# Altium PCB Roseta_Shield.PcbDoc
Units mm, origin at the board's own origin, x right, y up, seen from the top; angles counter-clockwise.
Board outline 152.4 x 101.6 mm, 2 copper layers (Top Layer, Bottom Layer); 72 components, 75 nets, 235 pads, 0 vias.
Unrouted connection lines stored in the file: 45.
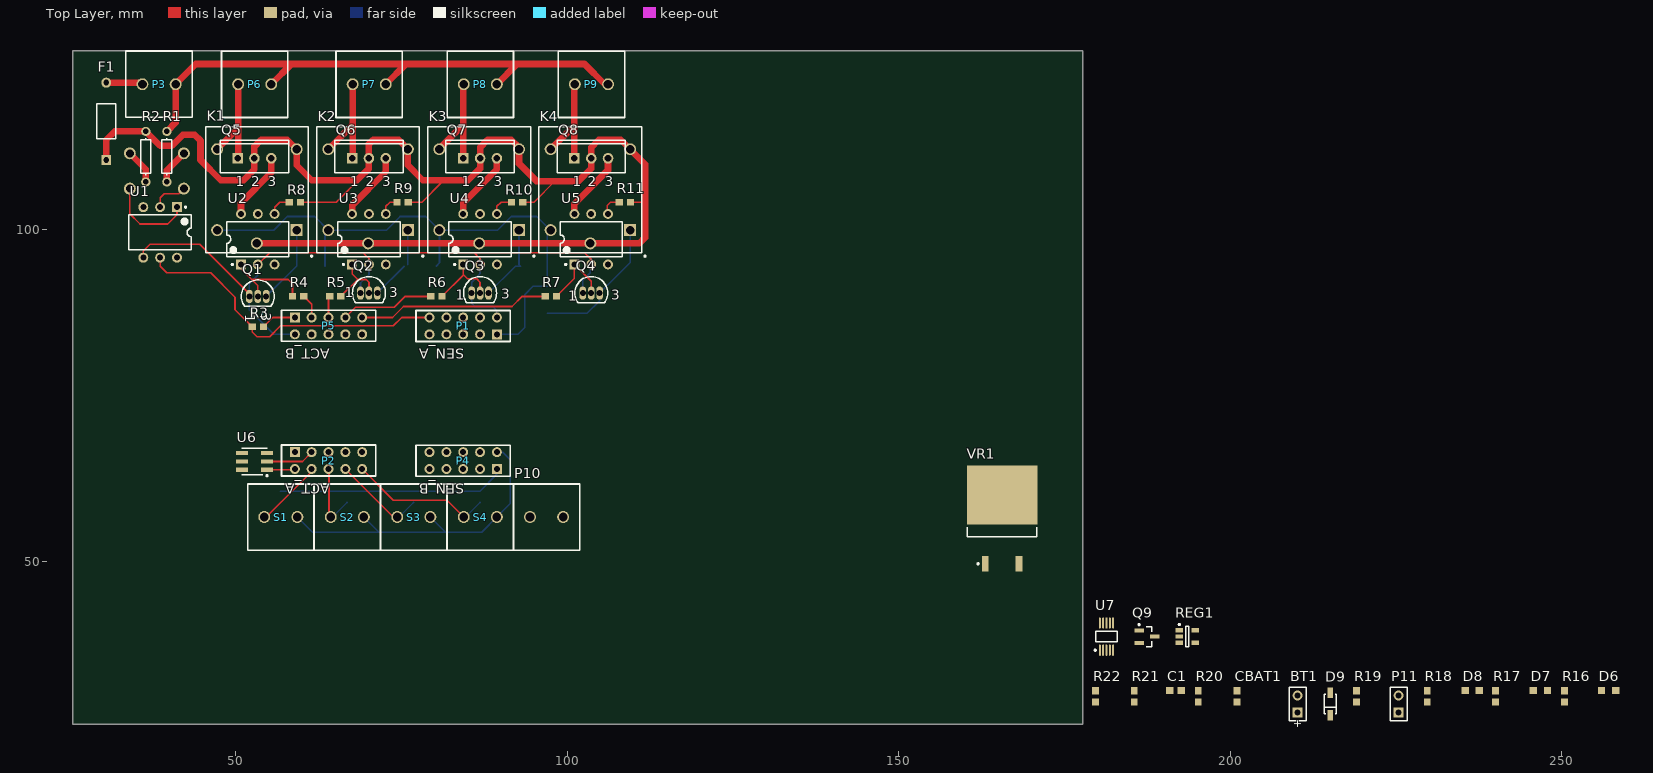
[diagram p0: Top Layer view]
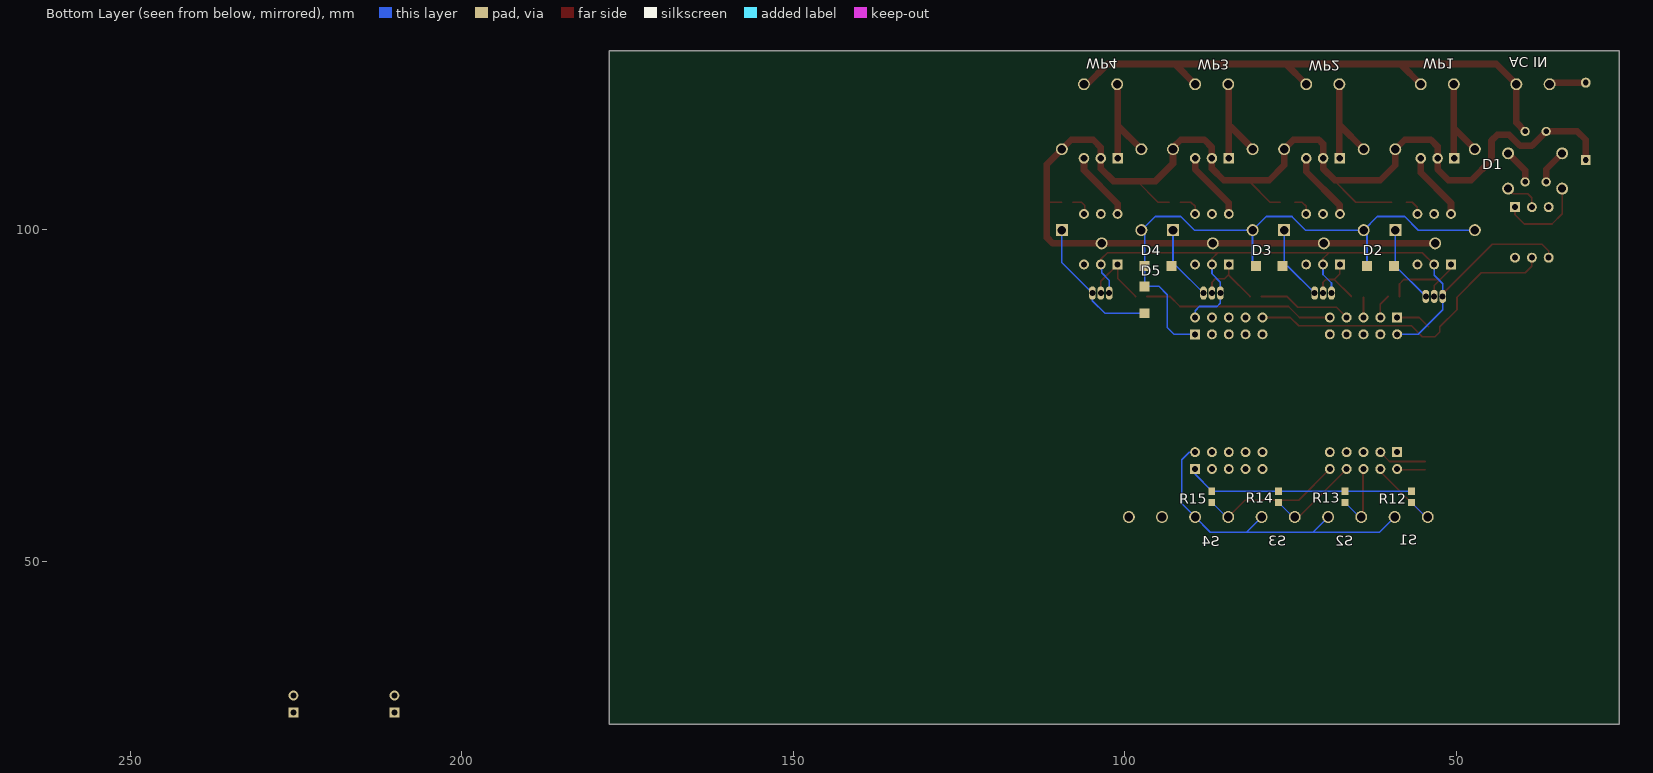
[diagram p1: Bottom Layer view, seen from below]

## Layer stack, top to bottom
Top Layer: signal copper 0.0356
Dielectric: dielectric 0.32, FR-4, Dk 4.8
Bottom Layer: signal copper 0.0356

## Board outline
25.4,25.4 177.8,25.4 177.8,127 25.4,127

## Design rules (kind name [scope] priority, off if disabled: settings)
Clearance [All] p1: gap=0.254
PolygonConnect [All] p1: connectstyle=Relief reliefconductorwidth=0.254 reliefentries=4 polygonreliefangle="90 Angle"
RoutingVias [All] p1: holewidth=0.711 width=1.27 viastyle="Through Hole" minholewidth=0.711 minwidth=1.27 maxholewidth=0.711 maxwidth=1.27
SilkscreenOverComponentPads [All] p1: minsilkscreentomaskgap=0.254
SolderMaskExpansion [All] p1: expansion=0.102
Width [All] p1: maxlimit=0.254 minlimit=0.254 preferedwidth=0.254
27 further rules are at their usual default settings.

## Classes and differential pairs
component class Battery: BT1 C1 CBAT1 D6 D7 D8 D9 P11 Q9 R16 R17 R18 R19 R20 R21 R22 REG1 U7
component class AC: D1 D2 D3 D4 D5 F1 K1 K2 K3 K4 P3 P6 P7 P8 P9 Q1 Q2 Q3 Q4 Q5 Q6 Q7 Q8 R1 R2 R3 R4 R5 R6 R7 R8 R9 R10 R11 U1 U2 U3 U4 U5
component class Roseta_Shield: P1 P2 P4 P5 P10 U6 VR1 VR?
component class Switches: R12 R13 R14 R15 S1 S2 S3 S4

## Components (designator, comment, footprint, x,y, rotation, side; value= is the part's Value field where it differs from the comment)
BT1 "Li-Ion" BAT-2 210.185,28.448 r90 top
C1 "Cap" 1608[0603] 191.77,30.48 r0 top
CBAT1 "Cap" 1608[0603] 201.041,29.591 r90 top
D1 "DF04M" DF04M 34.036,106.172 r90 bottom
D2 "Diode 1N4004" 1n4007 59.436,94.488 r0 bottom
D3 "Diode 1N4004" 1n4007 76.2,94.488 r0 bottom
D4 "Diode 1N4004" 1n4007 92.964,94.488 r0 bottom
D5 "Diode 1N4004" 1n4007 97.028,87.376 r90 bottom
D6 "Charge in Progress" 2013[0805] 256.032,30.48 r0 top
D7 "Charge Complete" 2013[0805] 245.745,30.48 r0 top
D8 "Power OK" 2013[0805] 235.458,30.48 r0 top
D9 "D Schottky" SOD123/X.85 215.138,28.448 r90 top
F1 "Fuse 2" PIN-W2/E2.8 30.48,116.332 r90 top
K1 "Relay-SPDT" RELAY-HRS4 60.96,96.52 r90 top
K2 "Relay-SPDT" RELAY-HRS4 77.724,96.52 r90 top
K3 "Relay-SPDT" RELAY-HRS4 94.488,96.52 r90 top
K4 "Relay-SPDT" RELAY-HRS4 111.252,96.52 r90 top
P1 "SEN_A" HDR2X5_Female_Slim 89.408,84.201 r180 top
P2 "ACT_A" HDR2X5_Female_Slim 58.928,66.421 r0 top
P3 "AC IN" "TERMINAL BLOCK X2" 35.941,121.92 r0 top
P4 "SEN_B" HDR2X5_Female_Slim 89.408,63.881 r180 top
P5 "ACT_B" HDR2X5_Female_Slim 58.928,86.741 r0 top
P6 "WP1" "TERMINAL BLOCK X2" 55.372,121.92 r180 top
P7 "WP2" "TERMINAL BLOCK X2" 72.644,121.92 r180 top
P8 "WP3" "TERMINAL BLOCK X2" 89.408,121.92 r180 top
P9 "WP4" "TERMINAL BLOCK X2" 106.172,121.92 r180 top
P10 "DC IN" "TERMINAL BLOCK X2" 99.4,56.642 r180 top
P11 "5V_IN" HDR1X2 225.425,27.178 r90 top
Q1 "2N3904" BCY-W3/E4 53.34,89.916 r270 top
Q2 "2N3904" BCY-W3/E4 70.104,90.424 r270 top
Q3 "2N3904" BCY-W3/E4 86.868,90.424 r270 top
Q4 "2N3904" BCY-W3/E4 103.632,90.424 r270 top
Q5 "BT138" 221A-09 52.832,110.744 r0 top
Q6 "BT138" 221A-09 70.104,110.744 r0 top
Q7 "BT138" 221A-09 86.868,110.744 r0 top
Q8 "BT138" 221A-09 103.632,110.744 r0 top
Q9 "BSH202" SOT95P240-3M 187.452,38.608 r0 top
R1 "1/2" AXIAL-0.3 39.624,110.998 r90 top
R2 "1/2" AXIAL-0.3 36.449,110.998 r90 top
R3 "Res2" 1608[0603] 53.34,85.344 r180 top
R4 "Res2" 1608[0603] 59.436,89.916 r180 top
R5 "Res2" 1608[0603] 65.024,89.916 r0 top
R6 "Res2" 1608[0603] 80.264,89.916 r0 top
R7 "Res2" 1608[0603] 97.536,89.916 r0 top
R8 "Res2" 1608[0603] 58.928,104.14 r0 top
R9 "Res2" 1608[0603] 75.184,104.14 r0 top
R10 "Res2" 1608[0603] 92.456,104.14 r0 top
R11 "Res2" 1608[0603] 108.712,104.14 r0 top
R12 "Res2" 1608[0603] 56.769,59.69 r270 bottom
R13 "Res2" 1608[0603] 66.802,59.69 r270 bottom
R14 "Res2" 1608[0603] 76.835,59.69 r270 bottom
R15 "Res2" 1608[0603] 86.868,59.69 r270 bottom
R16 "Res2" 1608[0603] 250.444,29.591 r90 top
R17 "Res2" 1608[0603] 240.03,29.591 r90 top
R18 "Res2" 1608[0603] 229.743,29.591 r90 top
R19 "Res2" 1608[0603] 219.075,29.591 r90 top
R20 "Res2" 1608[0603] 195.199,29.591 r90 top
R21 "Res2" 1608[0603] 185.547,29.591 r90 top
R22 "Res2" 1608[0603] 179.705,29.591 r90 top
REG1 "LD6806TD/33H" SOT-23-OT5_N 193.548,38.608 r0 top
S1 "SW-WALL" "TERMINAL BLOCK X2" 59.309,56.642 r180 top
S2 "SW-WALL" "TERMINAL BLOCK X2" 69.342,56.642 r180 top
S3 "SW-WALL" "TERMINAL BLOCK X2" 79.375,56.642 r180 top
S4 "SW-WALL" "TERMINAL BLOCK X2" 89.408,56.642 r180 top
U1 "Optoisolator1" DIP-6 38.608,99.568 r270 top
U2 "MOC3021" DIP-6 53.34,98.552 r90 top
U3 "MOC3021" DIP-6 70.104,98.552 r90 top
U4 "MOC3021" DIP-6 86.868,98.552 r90 top
U5 "MOC3021" DIP-6 103.632,98.552 r90 top
U6 "DS2431P" TSOC6 52.832,65.024 r90 top
U7 "MCP73833-AMI/UN" MSOP-UN10_N 181.356,38.608 r90 top
VR1 "LM7805" TO254P1510-3_4N 165.608,56.388 r90 top

## Footprints (in the part's own frame and the unit in brackets; to place one, negate y for a bottom-side part, rotate by r counter-clockwise, add the part's x,y. Pads: shape width x height; smd on the part's side, far side on the other; paste and mask are expansions set on the pad)
1n4007 [mm] "Chip Capacitor; Body 1.6 x 0.8 mm (LxW typ)"
  rect 1.5x1.5 smd: 1(0,0) 2(4.05,0)
  body extent -0.3,-0.75 4.4,0.75, height 2
221A-09 [mm] "TO, Thru-Hole, Vertical, Heatsink Mounted; 3 In-Line Leads; Pitch 2.54 mm"
  rect 1.6x1.6 hole 1: 1(-2.54,0)
  round 1.6 hole 1: 2(0,0) 3(2.54,0)
  silkscreen extent -5.15,-2.2 5.15,2.7
1608[0603] [mm] "Chip Capacitor; Body 1.6 x 0.8 mm (LxW typ)"
  rect 1.1x1 smd: 1(-0.85,0) 2(0.85,0)
  body extent -1,-0.5 0.9,0.5, height 1.3
2013[0805] [mm] "Chip Capacitor; Body 2.0 x 1.3 mm (LxW typ)"
  rect 1.1x1 smd: 1(0,0) 2(2.15,0)
  body extent 0,-0.5 2.15,0.5, height 1.3
AXIAL-0.3 [mm] "Axial Device, Thru-Hole; 2 Leads; 0.3 in Pin Spacing"
  round 1.4 hole 0.85: 1(-3.81,0) 2(3.81,0)
  silkscreen extent -2.77,-0.76 2.77,0.76
BAT-2 [mm] "Multicell Battery; 2 Leads"
  rect 1.5x1.5 hole 0.9: 1(-1.27,0)
  round 1.5 hole 0.9: 2(1.27,0)
  silkscreen extent -2.54,-1.27 2.54,1.27
BCY-W3/E4 [mm] "TO, Flat Index; 3 In-Line, Axial Leads; Body Dia. 4.5mm; Leads 0.51 x 0.48 mm (max)"
  oval 2x1 hole 0.9: 1(0,-1.27) 2(0,0) 3(0,1.27)
  silkscreen extent -2.48,-2.48 1.5,2.48
DF04M [mm] "Chip Capacitor; Body 2.0 x 1.3 mm (LxW typ)"
  round 1.8 hole 1.2: 1(0,0) 2(5.33,0) 3(0,8.15) 4(5.33,8.15)
DIP-6 [mm] "DIP; 6 Leads; Row Spacing 7.62 mm; Pitch 2.54 mm"
  rect 1.5x1.5 hole 0.9: 1(-3.81,2.54)
  round 1.5 hole 0.9: 2(-3.81,0) 3(-3.81,-2.54) 4(3.81,-2.54) 5(3.81,0) 6(3.81,2.54)
  silkscreen extent -3.93,-4.7 2.65,4.7, body extent -3.55,-4.7 3.55,4.7, height 5.46
HDR1X2 [mm] "Connector; Header; 2 Position"
  rect 1.5x1.5 hole 0.9: 1(0,0)
  round 1.5 hole 0.9: 2(2.54,0)
  silkscreen extent -1.27,-1.27 3.81,1.27
HDR2X5_Female_Slim [mm] "Connector; Header; 5x2 Housing"
  rect 1.5x1.5 hole 0.9: 1(0,0)
  round 1.5 hole 0.9: 2(0,-2.54) 3(2.54,0) 4(2.54,-2.54) 5(5.08,0) 6(5.08,-2.54) 7(7.62,0) 8(7.62,-2.54) 9(10.16,0) 10(10.16,-2.54)
  silkscreen extent -2,-3.6 12.2,1.07
MSOP-UN10_N [mm] "TSSOP, 10-Leads, Body 3x3mm, Pitch 0.5mm, IPC Medium Density"
  oval 1.7x0.3 smd: 1(-2.05,1) 2(-2.05,0.5) 3(-2.05,0) 4(-2.05,-0.5) 5(-2.05,-1) 6(2.05,-1) 7(2.05,-0.5) 8(2.05,0) 9(2.05,0.5) 10(2.05,1)
  silkscreen extent -2.17,-1.6 0.8,1.82, body extent -1.6,-1.6 1.6,1.6, height 1.1
PIN-W2/E2.8 [mm] "Fuse; 2 Leads"
  rect 1.5x1.5 hole 0.9: 1(-5.825,0)
  round 1.5 hole 0.9: 2(5.825,0)
  silkscreen extent -2.65,-1.4 2.65,1.4
RELAY-HRS4 [mm] "DIP; 5 Round Pins; Row Space 15.24 mm; Pitch 2.54 mm"
  round 1.8 hole 1.3: 1(1.4,7.75) 2(15.6,1.75) 3(15.6,13.75) 5(3.4,13.75)
  rect 1.8x1.8 hole 1.3: 4(3.4,1.75)
  silkscreen extent -0.65,-0.63 19,15.5
SOD123/X.85 [mm] "SOD-123; 2 Leads; Body 2.7 x 1.6 mm, (LxW)"
  rect 1.6x0.85 smd: 1(-1.7,0) 2(1.7,0)
  silkscreen extent -1.45,-0.9 1.45,0.9
SOT95P240-3M [mm] "SOT23, 3-Leads, Body 2.9x1.3mm, Pitch 0.95mm, Lead Span 2.4mm, IPC Low Density"
  rect 1.45x0.6 smd: 1(-1.175,0.95) 2(-1.175,-0.95) 3(1.175,0)
  silkscreen extent -1.3,-1.5 0.7,1.92, body extent -0.7,-1.5 0.7,1.5, height 1.14
SOT-23-OT5_N [mm] "SOT23, 5-Leads, Body 2.9x1.6mm, Pitch 0.95mm, Lead Span 2.7mm, IPC Medium Density"
  rect 1.1x0.65 smd: 1(-1.2,0.95) 2(-1.2,0) 3(-1.2,-0.95) 4(1.2,-0.95) 5(1.2,0.95)
  silkscreen extent -1.32,-1.55 0.25,1.95, body extent -0.9,-1.55 0.9,1.55, height 1.45
"TERMINAL BLOCK X2" [mm]
  round 1.8 hole 1.3: 1(0,0) 2(5,0)
  silkscreen extent -2.5,-4.98 7.5,5.02
TO254P1510-3_4N [mm] "D2-PAK, 4-Leads, Body 8.8x10.4mm, Pitch 2.54mm, Lead Span 15.1mm, IPC Medium Density"
  rect 2.4x1.05 smd: 1(-6.8,2.54) 3(-6.8,-2.54)
  rect 8.9x10.65 smd: 2(3.55,0)
  silkscreen extent -6.92,-5.25 -1.3,5.25, body extent -2.7,-5.28 6.3,5.28, height 4.69
TSOC6 [mm] "Small Outline; 6 C-Bend Leads; Body Width 3.8 mm; Pitch 1.27 mm"
  rect 0.65x1.8 smd: 1(-1.27,-1.9) 2(0,-1.9) 3(1.27,-1.9) 4(1.27,1.9) 5(0,1.9) 6(-1.27,1.9)
  silkscreen extent -2.27,-2.02 2,1.95

## Part data
BT1: library part Battery, "Multicell Battery"
C1 CBAT1: "Capacitor"
D1: library part Bridge2, "Diode Bridge"
D2 D3 D4 D5: "1 Amp General Purpose Rectifier"
D6 D7 D8: library part "LED SMD (0603)"
D9: "Schottky Diode"
F1: "Fuse"
K1 K2 K3 K4: "Single-Pole Dual-Throw Relay"
P1 P2 P4 P5: library part "Header 5X2", "Header, 5-Pin, Dual row"
P3 P6 P7 P8 P9 P10 P11: library part "Header 2", "Header, 2-Pin"
Q1 Q2 Q3 Q4: "NPN General Purpose Amplifier"
Q5 Q6 Q7 Q8: library part MAC15A6, "Silicon Bidirectional Triode Thyristor"
Q9: "P-channel Enhancement Mode MOSFET"
R1 R2: library part Res1, "Resistor"
R3 R4 R5 R6 R7 R8 R9 R10 R11 R12 R13 R14 R15 R16 R17 R18 R19 R20 R21 R22: "Resistor"
REG1: library part TC1014-1.8VCT713, "50 mA, 100 mA and 150 mA CMOS LDOs with Active-Low Shutdown and Reference Bypass, 5-Pin SOT-23, Extended Temperature, Tape and Reel"
S1 S2 S3 S4: library part SW-PB, "Switch"
U1: "4-Pin Phototransistor Optocoupler"
U2 U3 U4 U5: library part "Opto TRIAC", "Opto-Triac"
U6: library part DS2430AP, "256-Bit 1-Wire EEPROM"
U7: "Stand-Alone Linear Li-Ion/Li-Polymer Charge Management Controller with Power-Good Output, 4.2V, 10-Pin MSOP, Industrial Temperature"
VR1: library part "Volt Reg", "Voltage Regulator"

## Nets (pads, with @x,y where several pads share a name; then routed paths per layer and width w, separated by ;. In a path a pad name is that pad's centre, name@x,y a point inside that pad or via, vN(x,y) a via of type N, cw(c..) or ccw(c..) an arc to the next point about the centre after c; other vN are vias at no path point)
3.3V: P2.1 P4.1 P5.1 R12.1 R13.1 R14.1 R15.1 R22.2 REG1.5 | length 42.9
  Top Layer w0.254: 54.19,85.344 55.587,86.741 P5.1
  Bottom Layer w0.254: 59.905,60.54 R12.1 R13.1 R14.1 R15.1 89.408,63.08 P4.1
5V: D2.2 D3.2 D4.2 D5.2 D6.1 D7.1 D8.1 D9.1 K1.5 K2.5 K3.5 K4.5 P1.1 P11.2 Q9.1 R19.1 U7.1 U7.2 VR1.3 | length 87.7
  Bottom Layer w0.254: K1.5 55.724,99.92 57.785,101.981 61.913,101.981 K2.5 ; D2.2 63.486,99.432 K2.5 ; D3.2 80.738,94.976 K3.5 ; P1.1 92.583,84.201 93.599,85.217 93.599,90.17 94.855,91.426 D5.2 ; D5.2@97.014,91.948 D4.2 K4.5@97.014,99.432 ; K4.5 95.441,101.981 91.567,101.981 89.506,99.92 K3.5 ; K2.5 72.742,99.92 74.803,101.981 78.677,101.981 K3.5
12V: P10.2 VR1.1
AC_IN1: Q1.2 R4.2 U2.1 | length 13.5
  Top Layer w0.254: U2.1@50.8,94.107 52.451,92.456 ; Q1.2 53.34,91.567 52.451,92.456 ; R4.2 58.586,91.782 57.912,92.456 52.451,92.456
AC_IN2: Q2.2 R5.2 U3.1 | length 9.7
  Top Layer w0.254: R5.2 68.414,92.456 ; U3.1 67.564,93.306 68.414,92.456 ; Q2.2 70.104,92.075 69.723,92.456 68.414,92.456
AC_IN3: Q3.2 R6.2 U4.1 | length 10.8
  Top Layer w0.254: R6.2 84.328,93.13 84.328,93.218 ; U4.1 84.328,93.218 ; Q3.2 86.868,92.075 86.36,92.583 84.963,92.583 84.328,93.218
AC_IN4: Q4.2 R7.2 U5.1 | length 11.3
  Top Layer w0.254: R7.2 101.092,92.622 U5.1 103.632,92.202 Q4.2
AC_OUT1: K1.3 P6.2 Q5.1 | length 15.7
  Top Layer w1: K1.3 50.372,115.282 ; K1.3@47.216,112.113 K1.3@47.223,112.12 ; Q5.1@50.372,110.744 P6.2
AC_OUT2: K2.3 P7.2 Q6.1 | length 16.3
  Top Layer w1: K2.3 67.644,115.79 ; Q6.1@67.644,110.824 67.644,115.79 ; P7.2 67.644,115.79
AC_OUT3: K3.3 P8.2 Q7.1 | length 15.8
  Top Layer w1: K3.3@80.808,112.05 80.808,112.304 83.9,115.396 ; Q7.1@84.328,110.617 P8.2@84.328,121.793
AC_OUT4: K4.3 P9.2 Q8.1 | length 21.6
  Top Layer w1: K4.3@97.508,112.113 101.092,115.697 101.092,121.492 Q8.1
ADC0: P4.9
ADC1: P4.10
ADC2: P4.7
ADC3: P4.8
ADC4: P1.4
ADC5: P1.3
ADC6: P1.6
ADC7: P1.5
FASE: F1.1 K1.1 K1.2 K2.1 K2.2 K3.1 K3.2 K4.1 K4.2 Q5.2 Q6.2 Q7.2 Q8.2 R2.2 R8.2 R9.2 R10.2 R11.2 | length 217.7
  Top Layer w0.254: R8.2 65.151,104.14 69.025,108.013 ; R9.2@76.542,104.14 78.105,104.14 81.153,107.188 81.153,107.442 ; K3.2 K3.2@92.738,112.367 ; R10.2 94.996,104.14 98.171,107.315 ; R11.2 111.76,104.14
  Top Layer w1: F1.1 30.48,113.538 31.75,114.808 R2.2 38.608,112.649 40.386,112.649 42.037,114.3 43.815,114.3 44.704,113.411 44.704,110.49 47.752,107.442 51.181,107.442 52.832,109.093 Q5.2 52.832,112.522 53.848,113.538 57.792,113.538 K1.2 59.21,109.7 61.468,107.442 68.326,107.442 70.104,109.22 70.104,112.903 70.739,113.538 74.556,113.538 K2.2 75.974,109.7 78.232,107.442 81.153,107.442 85.09,107.442 86.868,109.22 Q7.2 86.868,112.395 88.011,113.538 91.567,113.538 K3.2@92.738,112.367 ; K1.1 K2.1 K3.1 K4.1 110.874,97.92 111.76,98.806 111.76,104.14 111.76,109.862 108.084,113.538 104.775,113.538 103.632,112.395 Q8.2 103.632,109.22 101.727,107.315 98.171,107.315 95.377,107.315 92.738,109.954 K3.2
GND: BT1.2 C1.1 CBAT1.2 P1.2 P2.2 P4.2 P5.2 P10.1 P11.1 Q1.1 Q2.1 Q3.1 Q4.1 R19.2 R20.1 R21.1 REG1.2 S1.1 S2.1 S3.1 S4.1 U1.4 U2.2 U3.2 U4.2 U5.2 U6.1 U7.5 VR1.2 | length 169.8
  Top Layer w0.254: U1.4 36.068,96.774 37.084,97.79 44.577,97.79 52.07,90.297 Q1.1 ; U2.2 55.118,96.52 69.215,96.52 ; U6.1 P2.2@58.801,63.754 ; U3.2 70.104,95.631 69.215,96.52 ; U4.2 86.868,95.631 85.979,96.52 ; U5.2 103.632,95.504 102.616,96.52 85.979,96.52 ; 69.215,96.52 85.979,96.52
  Bottom Layer w0.254: U2.2 53.34,93.091 52.07,91.821 Q1.1 52.07,87.884 55.753,84.201 P5.2 ; S1.1 61.595,54.356 71.628,54.356 ; Q2.1 68.834,91.948 70.104,93.218 U3.2 ; S2.1 71.628,54.356 ; S3.1 81.661,54.356 ; Q3.1@85.598,89.662 Q3.1 ; U4.2 86.868,93.345 85.598,92.075 Q3.1 ; P4.2 90.297,66.421 91.44,65.278 91.44,58.674 S4.1 87.122,54.356 81.661,54.356 ; P1.2 89.408,87.757 88.773,88.392 86.106,88.392 85.598,88.9 Q3.1 ; Q4.1 102.362,92.329 103.502,93.469 U5.2@103.502,94.742 ; 71.628,54.356 81.661,54.356
NetBT1_1: BT1.1 CBAT1.1 Q9.3 U7.9 U7.10
NetC1_2: C1.2 REG1.4
NetD1_1: D1.1 U1.1 | length 13.5
  Top Layer w0.254: D1.1 34.036,102.362 35.56,100.838 39.751,100.838 41.148,102.235 41.148,102.87 U1.1@40.64,103.378
NetD1_2: D1.2 R2.1 | length 5.6
  Top Layer w0.254: D1.2 D1.2@34.036,111.76
  Top Layer w1: D1.2 36.449,109.089 R2.1
NetD1_3: D1.3 U1.2 | length 5.6
  Top Layer w0.254: U1.2 38.608,104.775 39.243,105.41 41.424,105.41 D1.3
NetD1_4: D1.4 R1.1 | length 5.4
  Top Layer w1: R1.1 39.624,108.94 D1.4
NetD2_1: D2.1 K1.4 Q1.3 | length 11.9
  Bottom Layer w0.254: Q1.3 59.21,94.516 K1.4
NetD3_1: D3.1 K2.4 Q2.3 | length 11
  Bottom Layer w0.254: Q2.3 75.438,94.488 ; D3.1@75.974,94.714 K2.4
NetD4_1: D4.1 K3.4 Q3.3 | length 12
  Bottom Layer w0.254: Q3.3 92.202,94.488 D4.1 92.738,94.714 K3.4
NetD5_1: D5.1 K4.4 Q4.3 | length 21.2
  Bottom Layer w0.254: D5.1 102.997,87.376 104.902,89.281 Q4.3 109.502,95.024 K4.4
NetD6_2: D6.2 R16.1
NetD7_2: D7.2 R17.1
NetD8_2: D8.2 R18.1
NetD9_2: D9.2 Q9.2 REG1.1 REG1.3
NetF1_2: F1.2 P3.1 | length 5.2
  Top Layer w1: F1.2 P3.1@35.704,122.157
NetQ5_3: Q5.3 U2.6 | length 10.3
  Top Layer w1: U2.6 50.8,104.013 55.372,108.585 Q5.3
NetQ6_3: Q6.3 U3.6 | length 10.5
  Top Layer w1: U3.6 67.564,103.632 72.644,108.712 Q6.3
NetQ7_3: Q7.3 U4.6 | length 10.5
  Top Layer w1: U4.6 84.328,104.013 89.408,109.093 Q7.3
NetQ8_3: Q8.3 U5.6 | length 10.5
  Top Layer w1: U5.6 101.092,103.886 106.172,108.966 Q8.3
NetR8_1: R8.1 U2.4 | length 3.5
  Top Layer w0.254: U2.4@55.88,101.854 55.88,103.378 56.642,104.14 R8.1@57.57,104.14
NetR9_1: R9.1 U3.4 | length 3.1
  Top Layer w0.254: U3.4 72.644,103.505 73.279,104.14 R9.1
NetR10_1: R10.1 U4.4 | length 3.6
  Top Layer w0.254: U4.4 89.408,103.505 90.043,104.14 R10.1
NetR11_1: R11.1 U5.4 | length 3.3
  Top Layer w0.254: U5.4@106.042,102.362 106.042,103.629 106.553,104.14 R11.1
NetR20_2: R20.2 U7.8
NetR21_2: R21.2 U7.6
NEUTRAL: P3.2 P6.1 P7.1 P8.1 P9.1 R1.2 | length 87.8
  Top Layer w1: R1.2 40.941,116.125 P3.2 43.989,124.968 58.42,124.968 ; P6.1 58.42,124.968 ; P7.1 75.692,124.968 ; P8.1 92.456,124.968 ; P9.1@105.664,121.92 102.616,124.968 58.42,124.968
PB0: P5.9 R7.1 | length 28.9
  Top Layer w0.254: P5.9 73.66,86.741 75.311,88.392 91.694,88.392 93.218,89.916 R7.1
PB1: P5.10
PB2: P5.7 R6.1 | length 14.2
  Top Layer w0.254: P5.7 68.072,88.265 73.914,88.265 75.565,89.916 R6.1
PB3: P5.8
PB4: P5.5 R5.1 | length 3
  Top Layer w0.254: P5.5 R5.1@64.008,89.75
PB5: P5.6
PB6: P5.3 R4.1 | length 3.7
  Top Layer w0.254: R4.1 61.468,88.734 P5.3
PB7: P5.4
PD0: P1.8
PD1: P1.7
PD2: P1.10 R3.2 U1.5 | length 49.1
  Top Layer w0.254: U1.5 38.608,94.488 39.624,93.472 46.228,93.472 49.911,89.789 49.911,87.923 R3.2 52.49,84.543 53.213,83.82 55.118,83.82 56.769,85.471 73.787,85.471 75.057,86.741 P1.10
PD3: P1.9
PE0: P2.3 U6.2 | length 7.3
  Top Layer w0.254: U6.2 60.071,65.024 P2.3
PE1: P2.4 R12.2 S1.2 | length 13.8
  Top Layer w0.254: S1.2 54.61,56.642 61.468,63.5 P2.4
  Bottom Layer w0.254: S1.2 54.571,56.642 R12.2
PE2: P2.5
PE3: P2.6 R13.2 S2.2 | length 10.6
  Top Layer w0.254: S2.2@64.088,56.642 P2.6@64.088,63.881
  Bottom Layer w0.254: S2.2 64.604,56.642 R13.2
PE4: P2.7
PE5: P2.8 R14.2 S3.2 | length 13.6
  Top Layer w0.254: P2.8 S3.2@73.787,56.642
  Bottom Layer w0.254: S3.2 74.637,56.642 R14.2
PE6: P2.9
PE7: P2.10 R15.2 S4.2 | length 21.7
  Top Layer w0.254: P2.10 73.787,59.182 81.868,59.182 S4.2
  Bottom Layer w0.254: S4.2 84.67,56.642 R15.2
PG: R18.2 R22.1 U7.7
PG0: P4.6
PG1: P4.5
PG2: P4.4
PG5: P4.3
STAT1: R16.2 U7.3
STAT2: R17.2 U7.4
VCC: R3.1
pads on no net: U1.3 U1.6 U2.3 U2.5 U3.3 U3.5 U4.3 U4.5 U5.3 U5.5 U6.3 U6.4 U6.5 U6.6

## Text inside footprints (layer, text, board x,y; h text height)
BT1: Top Overlay "+" at 210.762,24.778 h1.15 r90
Q1: Top Overlay "3" at 53.85,87.486 h1.5 r270; Top Overlay "1" at 51.44,87.256 h1.5 r270
Q2: Top Overlay "3" at 73.152,89.789 h1.5; Top Overlay "1" at 66.421,89.789 h1.5
Q3: Top Overlay "3" at 90.043,89.535 h1.5; Top Overlay "1" at 83.185,89.408 h1.5
Q4: Top Overlay "3" at 106.68,89.408 h1.5; Top Overlay "1" at 100.203,89.281 h1.5
Q5: Top Overlay "1" at 50.042,106.569 h1.5; Top Overlay "2" at 52.332,106.569 h1.5; Top Overlay "3" at 54.872,106.569 h1.5
Q6: Top Overlay "1" at 67.314,106.569 h1.5; Top Overlay "2" at 69.604,106.569 h1.5; Top Overlay "3" at 72.144,106.569 h1.5
Q7: Top Overlay "1" at 84.078,106.569 h1.5; Top Overlay "2" at 86.368,106.569 h1.5; Top Overlay "3" at 88.908,106.569 h1.5
Q8: Top Overlay "1" at 100.842,106.569 h1.5; Top Overlay "2" at 103.132,106.569 h1.5; Top Overlay "3" at 105.672,106.569 h1.5